# Altium PCB PCB1.PcbDoc
Units mm, origin at the board's own origin, x right, y up, seen from the top; angles counter-clockwise.
Board outline 35.31 x 34.92 mm, 6 copper layers (Top Layer, Layer 1, Layer 2, Layer 3, Layer 4, Bottom Layer), stack 0.746 mm thick; 35 components, 26 nets, 127 pads, 54 vias.
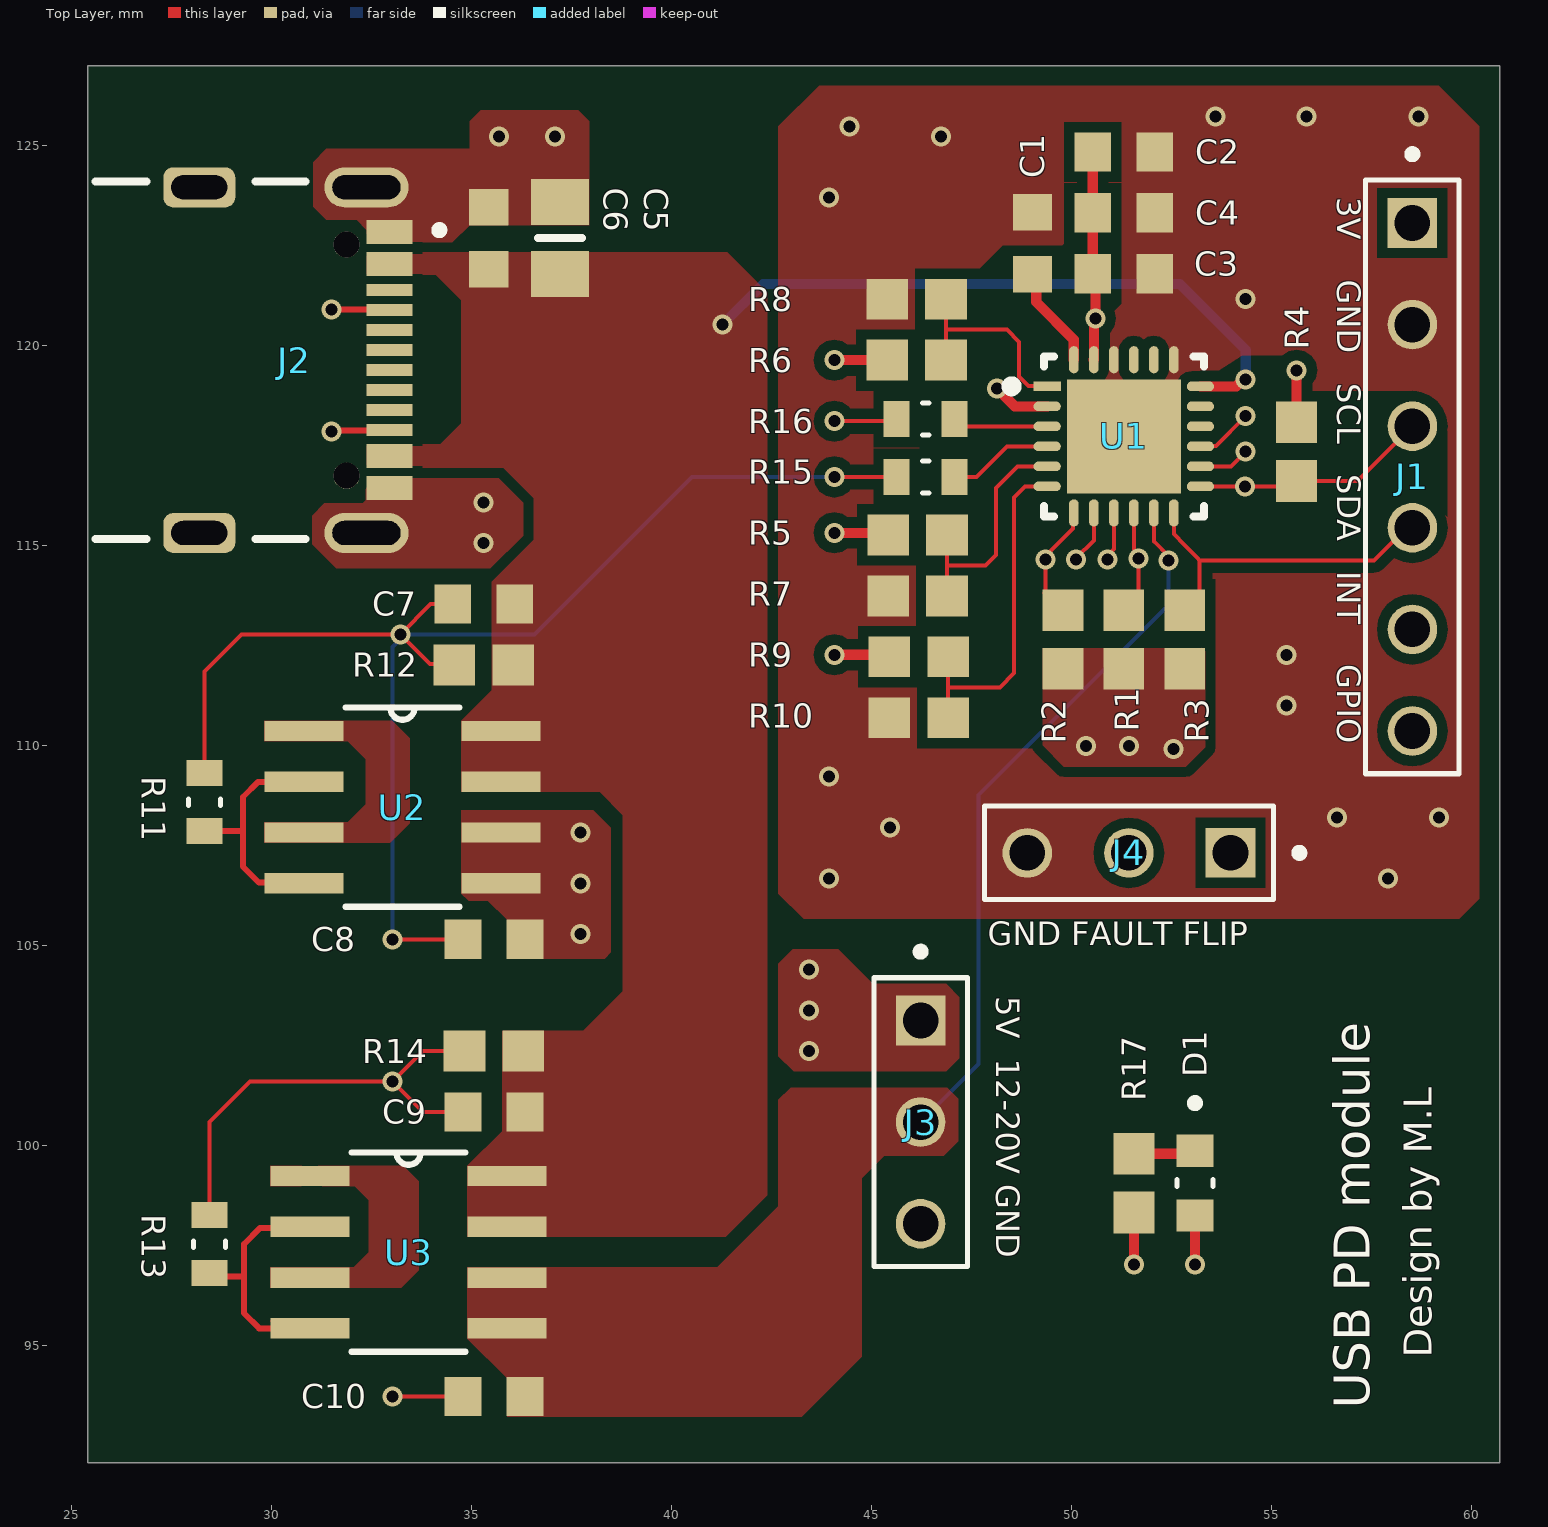
[diagram p0: Top Layer view]
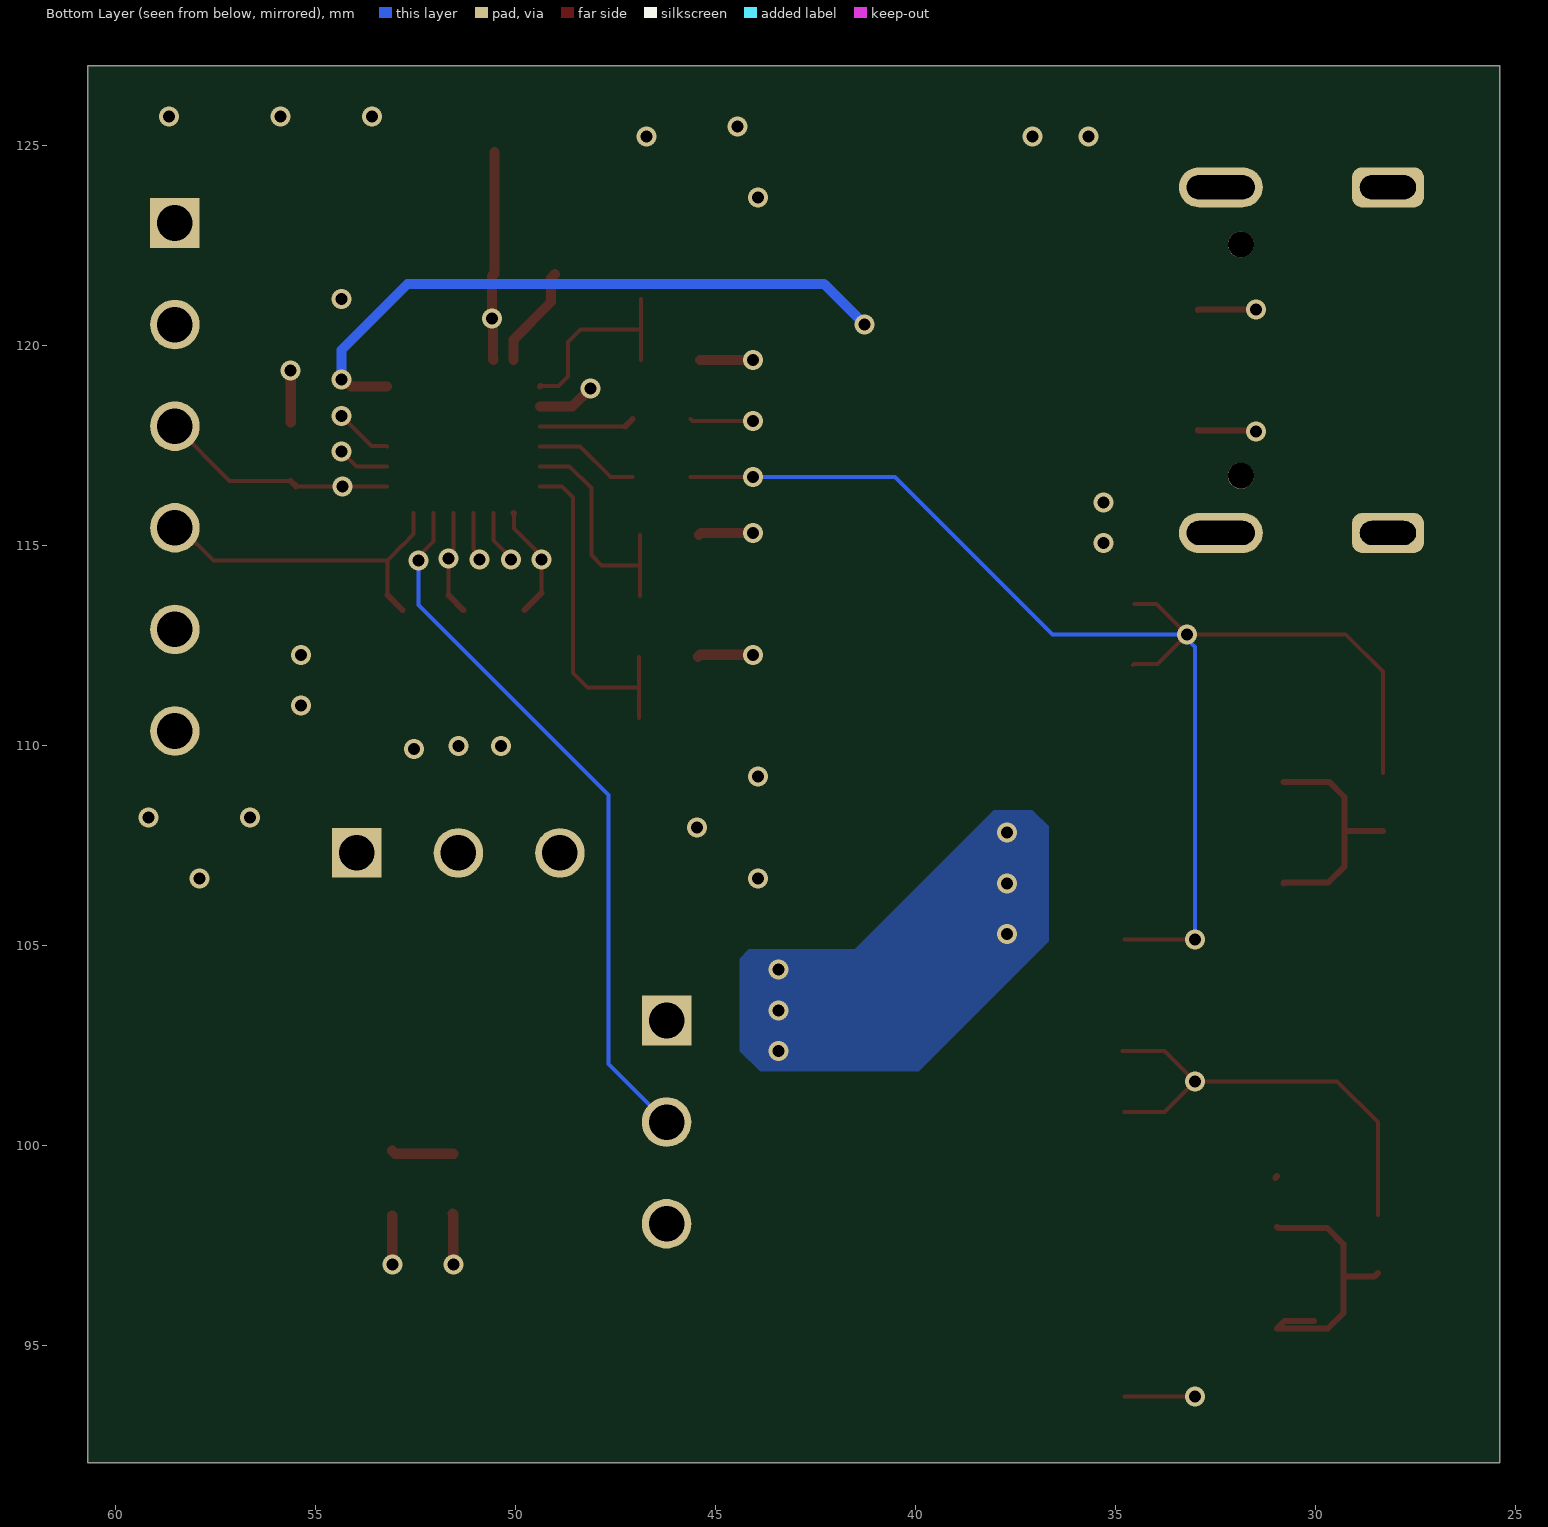
[diagram p1: Bottom Layer view, seen from below]
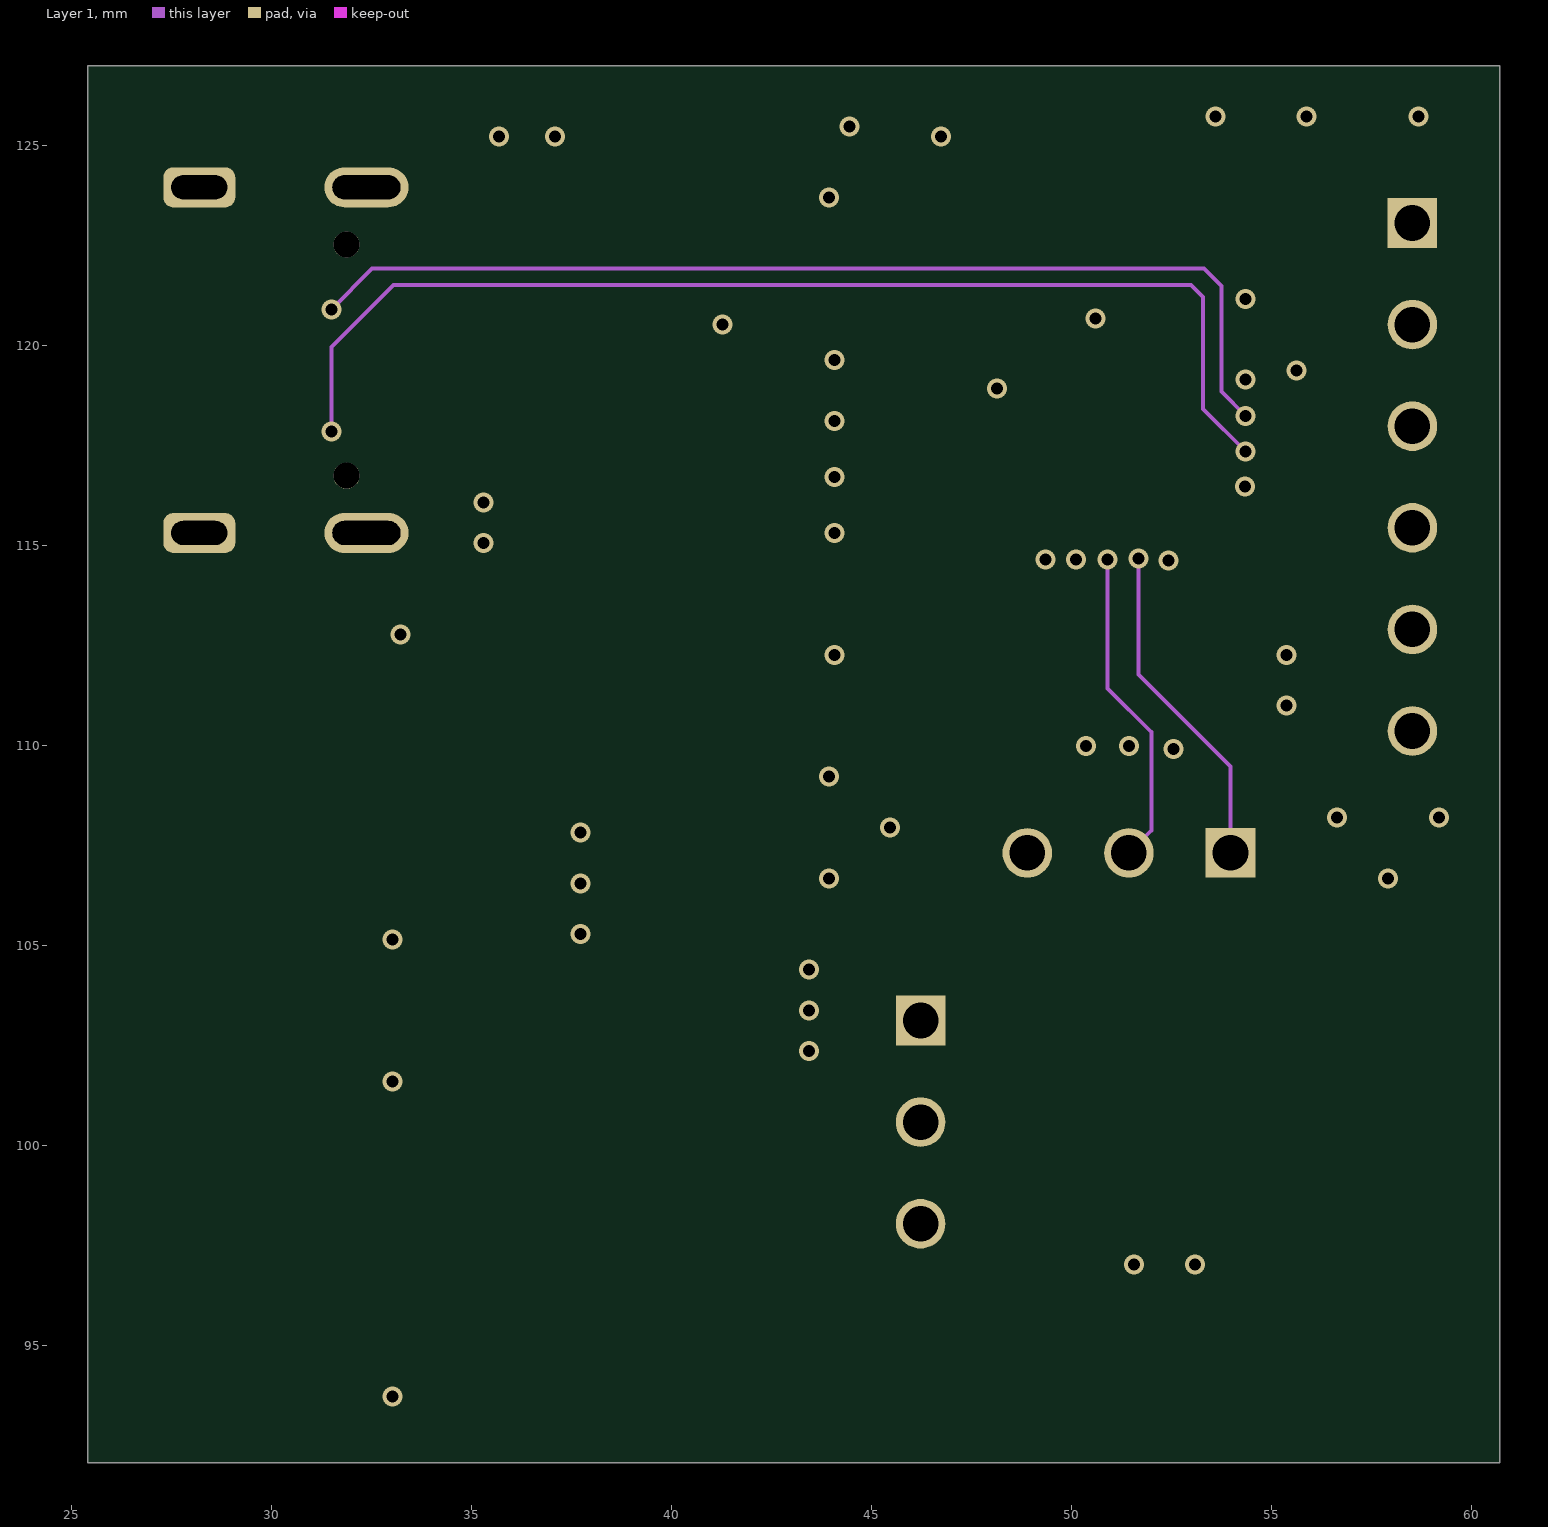
[diagram p2: Layer 1]
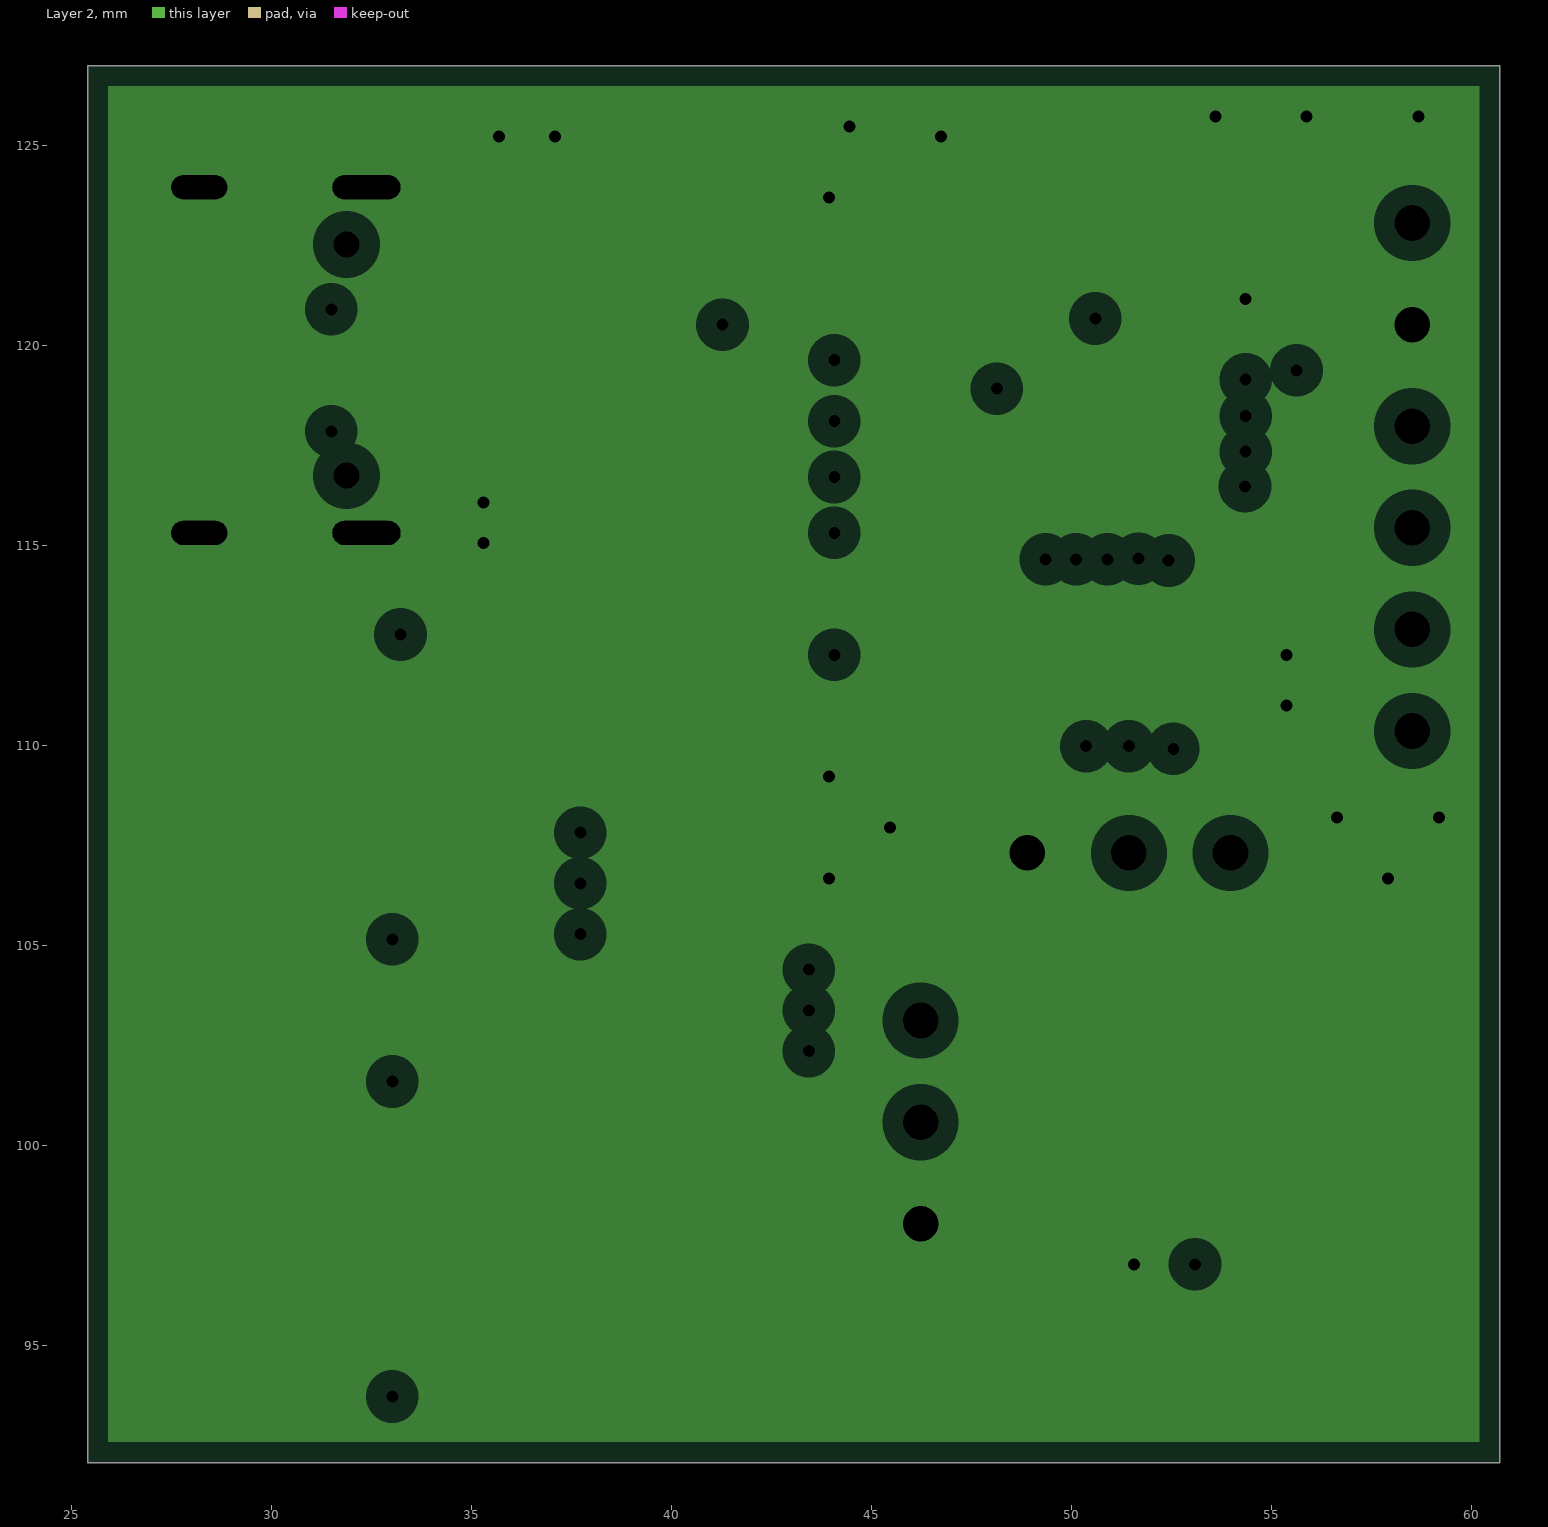
[diagram p3: Layer 2, clearances drawn from the general rule]
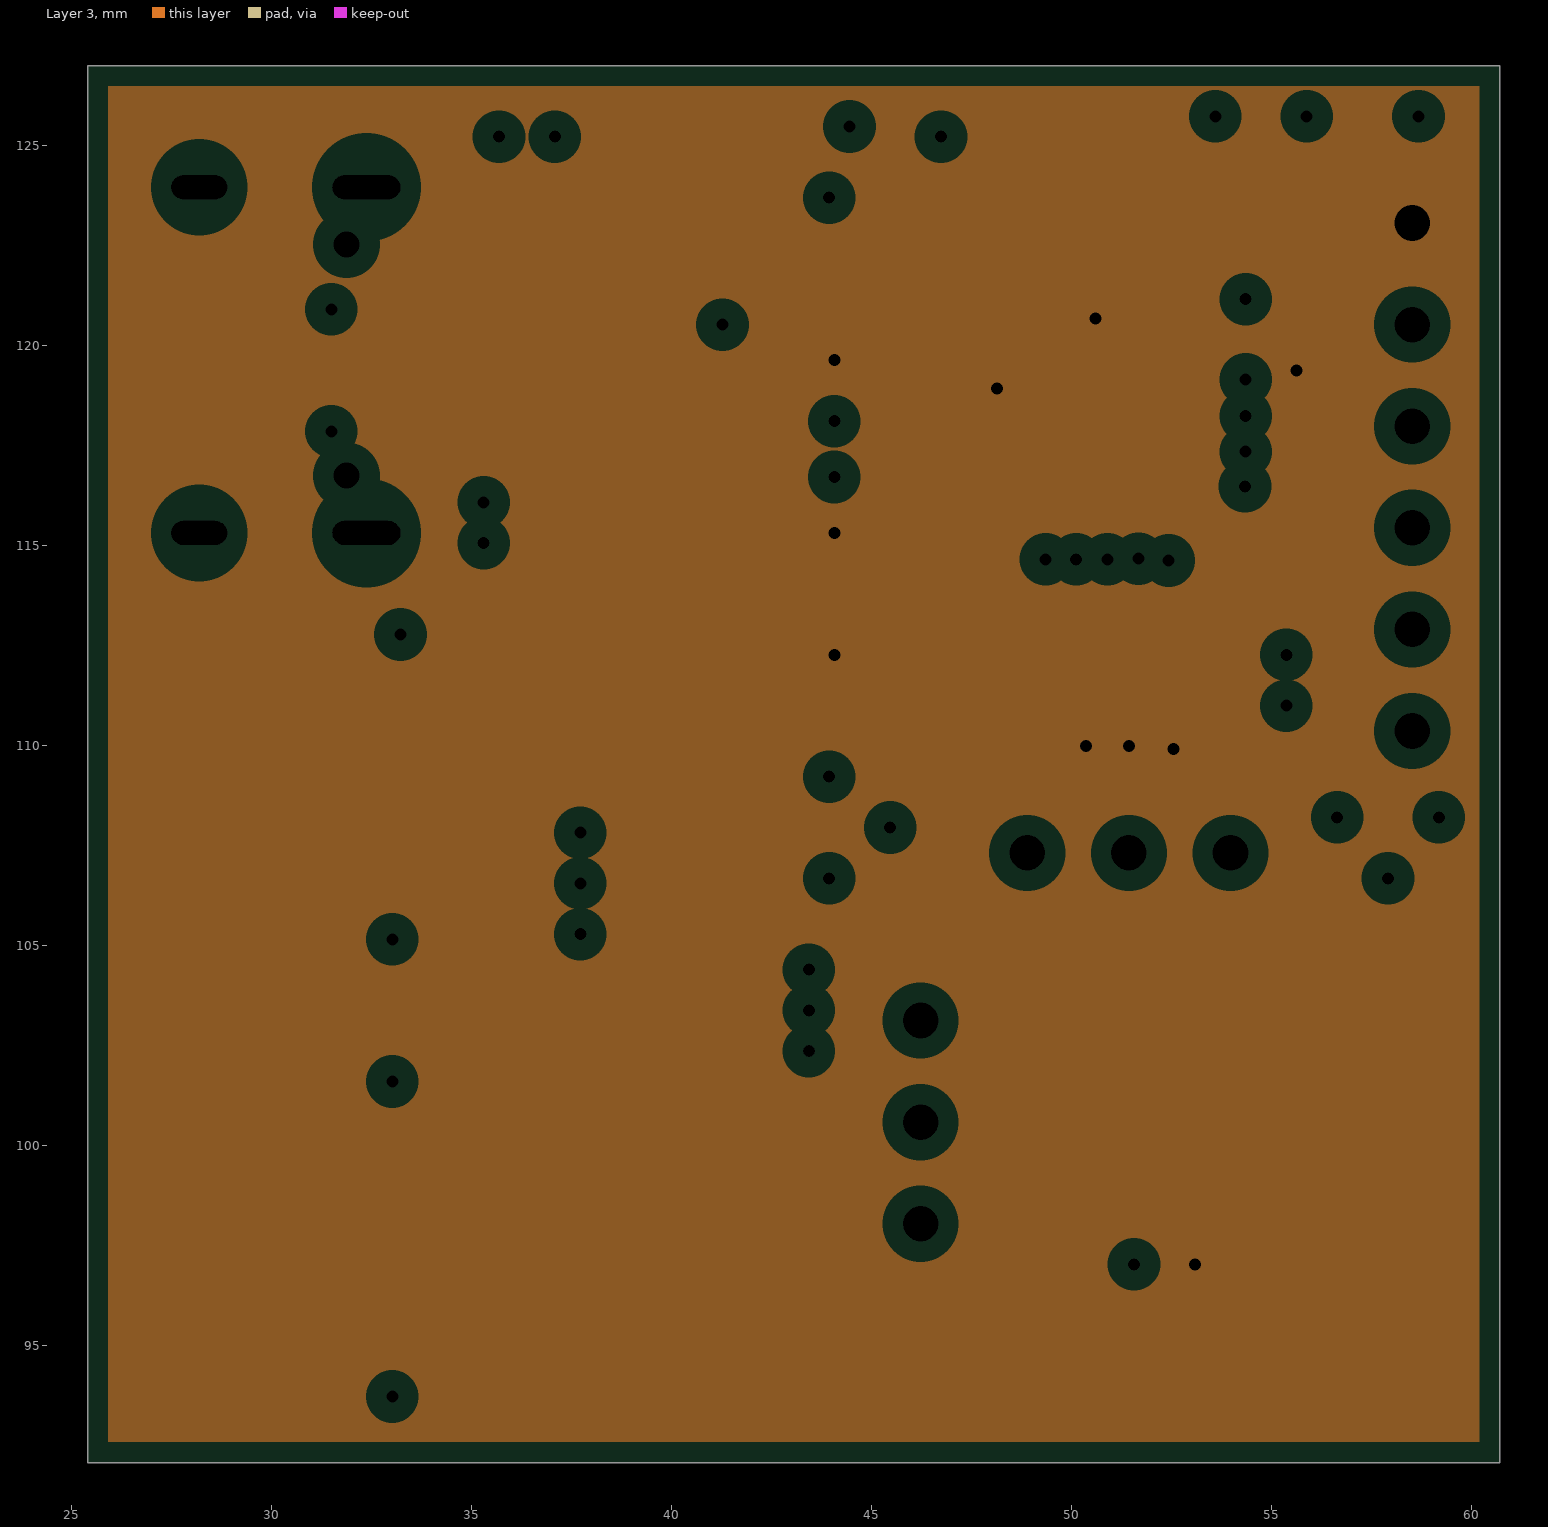
[diagram p4: Layer 3, clearances drawn from the general rule]
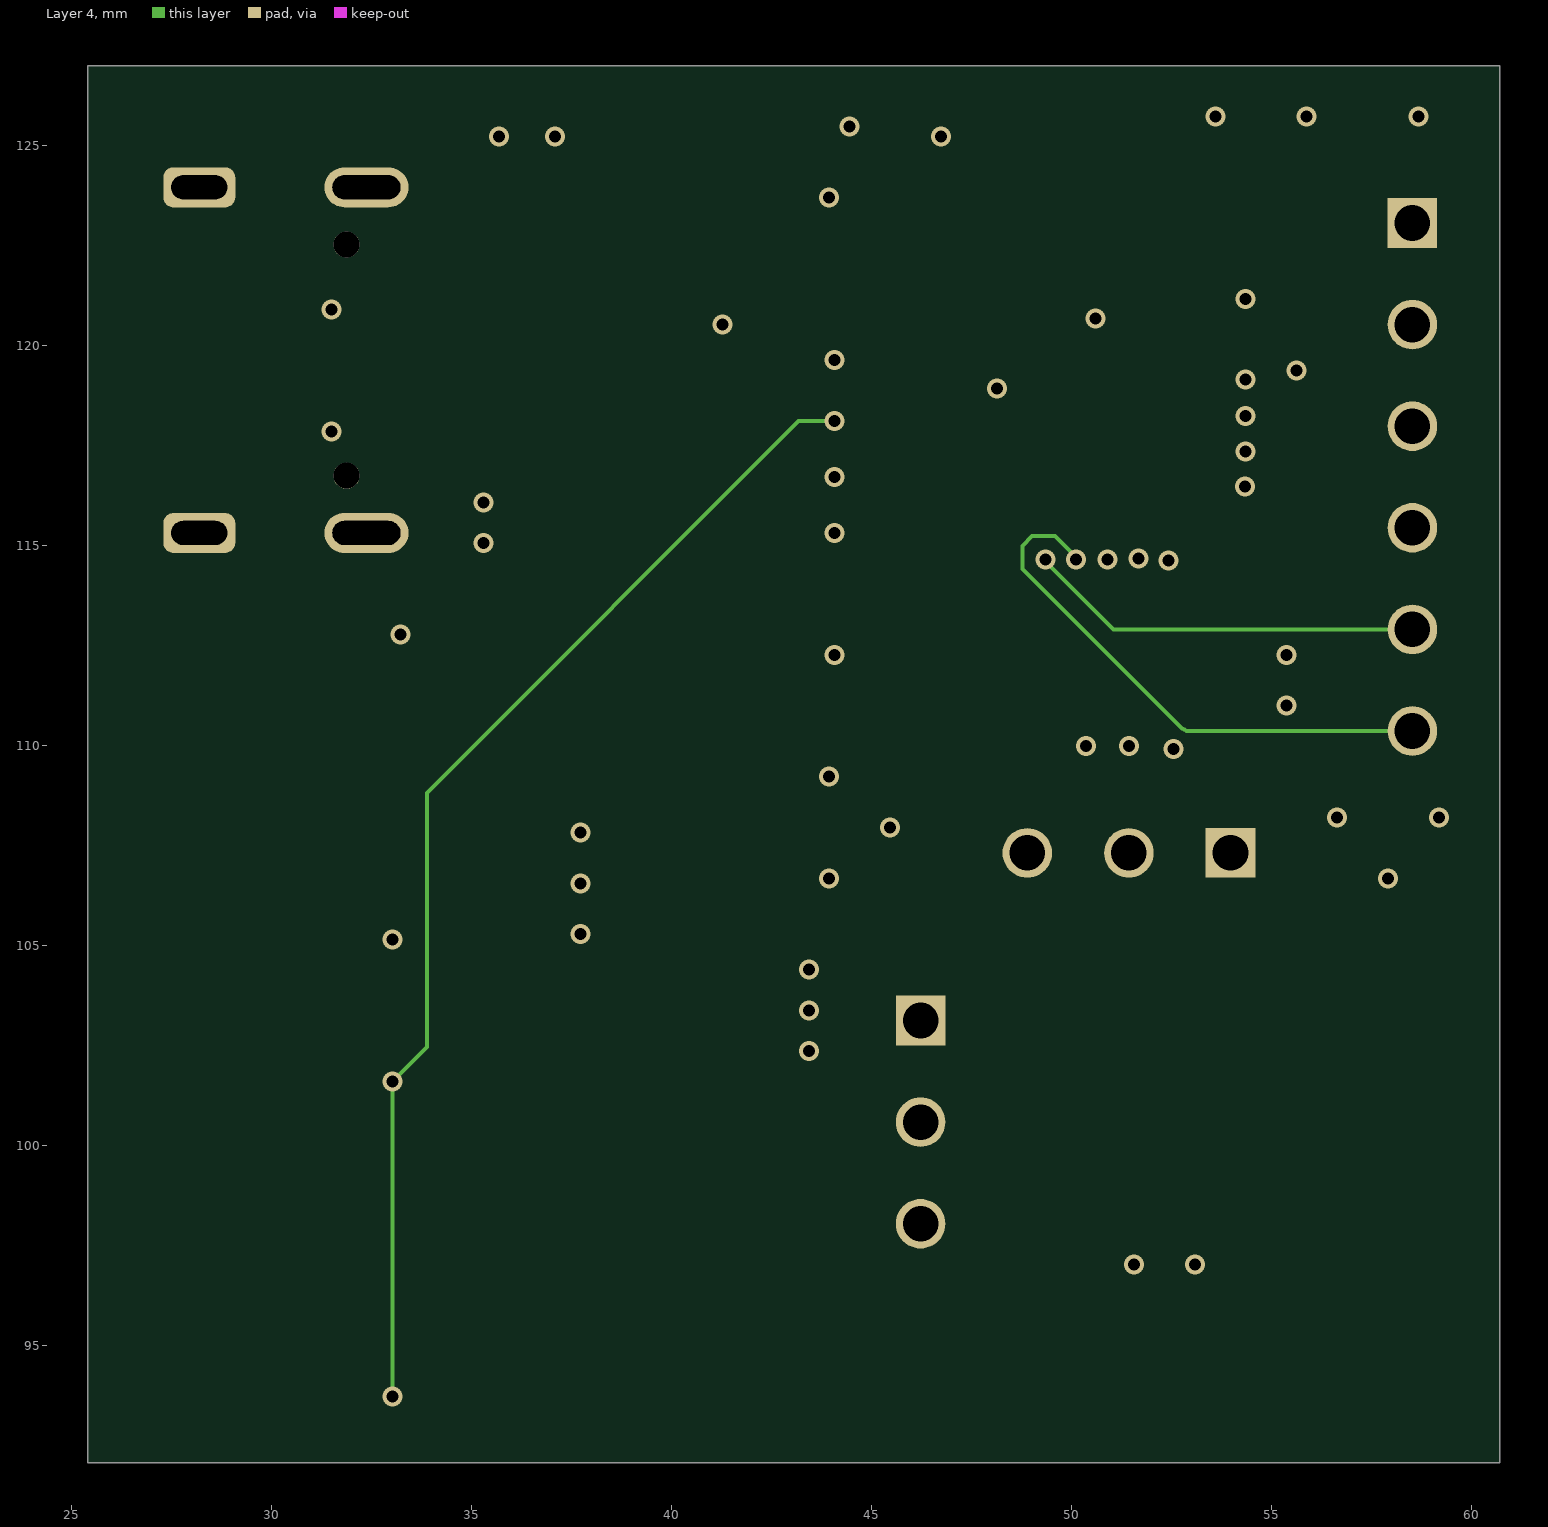
[diagram p5: Layer 4]
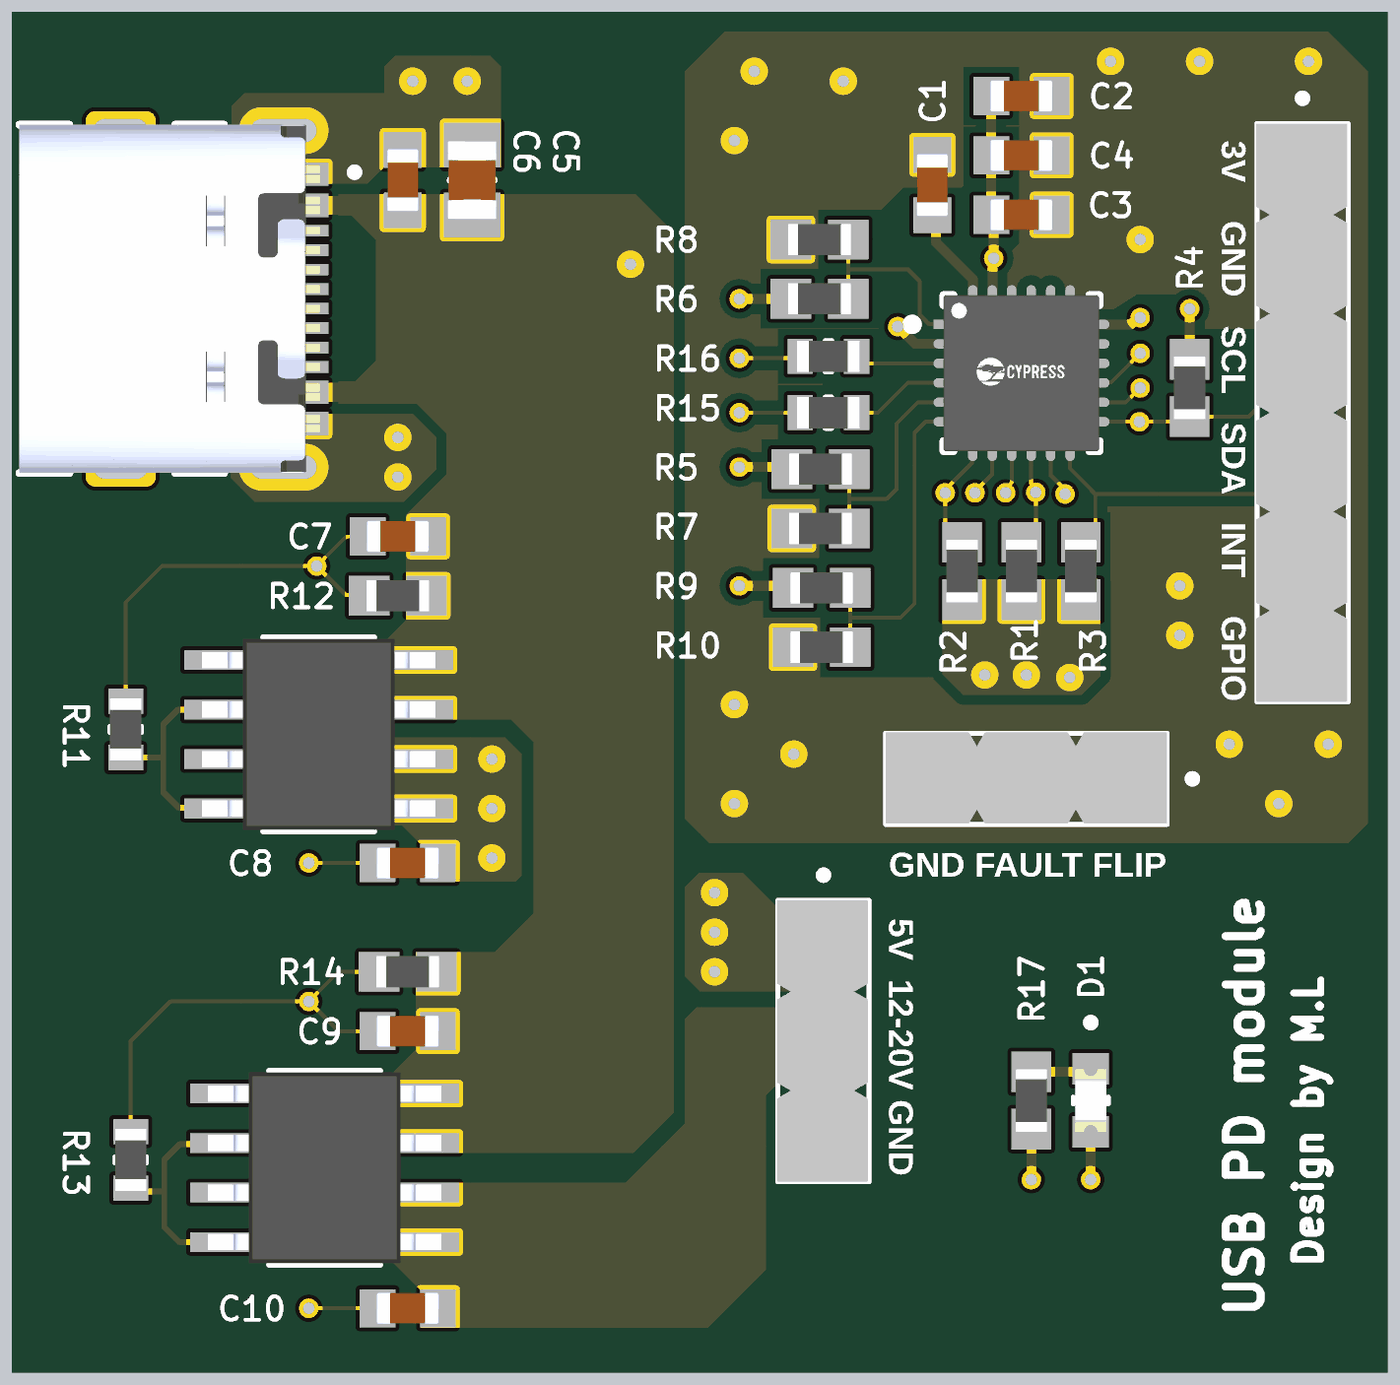
[diagram p6: 3D render of the assembled board from above, using the file's embedded part models]

## Layer stack, top to bottom
Top Solder: solder mask 0.0102, Solder Resist, Dk 3.5
Top Layer: signal copper 0.0356
Dielectric 2: prepreg 0.0711, PP-006, Dk 4.1
Layer 1: signal copper 0.0175
Dielectric 4: prepreg 0.0711, PP-006, Dk 4.1
Layer 2: plane copper 0.0175, net GND
Dielectric 1: dielectric 0.32, FR-4, Dk 4.8
Layer 3: plane copper 0.0175, net +3V3
Dielectric 5: prepreg 0.0711, PP-006, Dk 4.1
Layer 4: signal copper 0.0175
Dielectric 3: prepreg 0.0711, PP-006, Dk 4.1
Bottom Layer: signal copper 0.0356
Bottom Solder: solder mask 0.0102, Solder Resist, Dk 3.5

## Board outline
25.4,127 25.4,92.075 60.706,92.075 60.706,127

## Design rules (kind name [scope] priority, off if disabled: settings)
Clearance Clearance_1 [(ExistsOnLayer('Layer 1') Or ExistsOnLayer('Layer 4')) vs (ExistsOnLayer('Layer 1') Or ExistsOnLayer('Layer 4'))] p1: gap=0.254 ignorepadtopadclearanceinfootprint=TRUE except(0.1: Arc-SMDPad Track-SMDPad; 0.127: Arc-Arc Arc-Track Track-Track SMDPad-SMDPad; 0.33: Arc-THPad Track-THPad) sourcerule=36 cellrowname=All cellrowtype=0 cellcolname=All cellcoltype=0 innerlayers=TRUE
Clearance Clearance_2 [(ExistsOnLayer('Top Layer') Or ExistsOnLayer('Bottom Layer')) vs (ExistsOnLayer('Top Layer') Or ExistsOnLayer('Bottom Layer'))] p2: gap=0.254 ignorepadtopadclearanceinfootprint=TRUE except(0.1: Arc-SMDPad Track-SMDPad; 0.127: Arc-Arc Arc-Track Track-Track SMDPad-SMDPad; 0.33: Arc-THPad Track-THPad) sourcerule=36 cellrowname=All cellrowtype=0 cellcolname=All cellcoltype=0 outerlayers=TRUE
Clearance [All] p3: gap=0.254 ignorepadtopadclearanceinfootprint=TRUE except(0.1: Arc-SMDPad Track-SMDPad; 0.127: Arc-Arc Arc-Track Track-Track SMDPad-SMDPad; 0.33: Arc-THPad Track-THPad) ismatrix=TRUE
HoleToHoleClearance [All] p1: gap=0.5 allowstackedmicrovias=TRUE
PlaneClearance [All] p1: clearance=0.508
PlaneConnect [All] p1: planeconnectstyle=Direct reliefexpansion=0.508 reliefentries=4 reliefconductorwidth=0.254 reliefairgap=0.254
PolygonConnect [All] p1: connectstyle=Direct reliefconductorwidth=0.254 reliefentries=4 polygonreliefangle="90 Angle" airgapwidth=0.254
RoutingVias [All] p1: holewidth=0.3 width=0.5 viastyle="Through Hole" minholewidth=0.3 minwidth=0.5 maxholewidth=0.3 maxwidth=0.5
SolderMaskExpansion [All] p1: expansion=0.102 istentingtop=FALSE
Width [All] p1: maxlimit=5 minlimit=0.09 preferedwidth=0.254 minimp=50.000000 maximp=50.000000 favimp=50.000000
27 further rules are at their usual default settings.

## Components (designator, comment, footprint, x,y, rotation, side; value= is the part's Value field where it differs from the comment)
C1 "CL10A105KB8NNNC" CAPC1608X94N 49.022,122.555 r90 top
C2 "CL10B104KO8NNNC" CAPC1608X94N 51.308,124.841 r0 top
C3 "CL10B104KO8NNNC" CAPC1608X94N 51.308,121.793 r0 top
C4 "CL10A105KB8NNNC" CAPC1608X94N 51.308,123.317 r0 top
C5 "CL21A475KBQNNNE" CAPC2012X140N 37.211,122.682 r270 top
C6 "CL10B104KO8NNNC" CAPC1608X94N 35.433,122.682 r90 top
C7 "CL10A105KB8NNNC" CAPC1608X94N 35.306,113.538 r0 top
C8 "CL10A105KB8NNNC" CAPC1608X94N 35.56,105.156 r0 top
C9 "CL10A105KB8NNNC" CAPC1608X94N 35.56,100.838 r0 top
C10 "CL10A105KB8NNNC" CAPC1608X94N 35.56,93.726 r0 top
D1 "LTST-C190GKT" LEDC1608X35N 53.086,99.06 r270 top
J1 "5-146285-6" TE_5-146285-6 58.522,123.063 r270 top
J2 "USB4105-GF-A" GCT_USB4105-GF-A 28.194,119.634 r270 top
J3 "5-146285-3" TE_5-146285-3 46.228,103.124 r270 top
J4 "5-146285-3" TE_5-146285-3 53.975,107.315 r180 top
R1 "RC0603JR-074K7L" RESC1607X60N 51.308,112.649 r270 top
R2 "ERJ-2RKF2201X" RESC1607X60N 49.784,112.649 r270 top
R3 "ERJ-2RKF2201X" RESC1607X60N 52.832,112.649 r270 top
R4 "ERJ-2RKF2201X" RESC1607X60N 55.626,117.348 r90 top
R5 "ERJ-2RKF2201X" RESC1607X60N 46.153,115.265 r0 top
R6 "ERJ-2RKF2201X" RESC1607X60N 46.128,119.634 r0 top
R7 "ERJ-2RKF2201X" RESC1607X60N 46.153,113.741 r180 top
R8 "ERJ-2RKF2201X" RESC1607X60N 46.128,121.158 r180 top
R9 "ERJ-2RKF2201X" RESC1607X60N 46.18,112.217 r0 top
R10 "ERJ-2RKF2201X" RESC1607X60N 46.18,110.693 r180 top
R11 "ERJ-3GEY0R00V" RES_ERJ-3GEY0R00V 28.321,108.585 r270 top
R12 "RC0603FR-0710KL" RESC1607X60N 35.306,112.014 r0 top
R13 "ERJ-3GEY0R00V" RES_ERJ-3GEY0R00V 28.448,97.536 r270 top
R14 "RC0603FR-0710KL" RESC1607X60N 35.56,102.362 r0 top
R15 "ERJ3EKF1001V" RES_ERJ3EKF1001V 46.355,116.713 r180 top
R16 "ERJ3EKF1001V" RES_ERJ3EKF1001V 46.355,118.161 r180 top
R17 "ERJ-2RKF2201X" RESC1607X60N 51.562,99.06 r90 top
U1 "CYPD3177-24LQXQ" FP-002-16934-IPC_C 51.308,117.729 r0 top
U2 "IRF9358TRPBF" SOIC127P600X175-8N 33.274,108.458 r0 top
U3 "IRF9358TRPBF" SOIC127P600X175-8N 33.426,97.333 r0 top

## Footprints (in the part's own frame and the unit in brackets; to place one, negate y for a bottom-side part, rotate by r counter-clockwise, add the part's x,y. Pads: shape width x height; smd on the part's side, far side on the other; paste and mask are expansions set on the pad)
CAPC1608X94N [mm]
  rect 0.92x0.98 smd: 1(-0.775,0) 2(0.775,0)
  body extent -0.8,-0.41 0.8,0.41, height 0.5
CAPC2012X140N [mm]
  rect 1.15x1.45 smd: 1(-0.9,0) 2(0.9,0)
  silkscreen extent 0,-0.55 0,0.55, body extent -1,-0.63 1,0.63, height 1.35
FP-002-16934-IPC_C [mm]
  rect 0.681x0.239 smd paste+0 mask+0: 1(-1.916,1.25)
  rrect100% 0.681x0.239 smd paste+0 mask+0: 2(-1.916,0.75) 3(-1.916,0.25) 4(-1.916,-0.25) 5(-1.916,-0.75) 6(-1.916,-1.25) 13(1.916,-1.25) 14(1.916,-0.75) 15(1.916,-0.25) 16(1.916,0.25) 17(1.916,0.75) 18(1.916,1.25)
  rrect100% 0.239x0.681 smd paste+0 mask+0: 7(-1.25,-1.916) 8(-0.75,-1.916) 9(-0.25,-1.916) 10(0.25,-1.916) 11(0.75,-1.916) 12(1.25,-1.916) 19(1.25,1.916) 20(0.75,1.916) 21(0.25,1.916) 22(-0.25,1.916) 23(-0.75,1.916) 24(-1.25,1.916)
  rect 2.85x2.85 smd paste-1000 mask+0: 25(0,0)
  silkscreen extent -2.93,-2 2,2, body extent -2.36,-2.36 2.36,2.36, height 0.25
GCT_USB4105-GF-A [mm]
  rect 0.6x1.15 smd: A1_B12(-3.2,4.755) A4_B9(-2.4,4.755) B1_A12(3.2,4.755) B4_A9(2.4,4.755)
  rect 0.3x1.15 smd: A5(-1.25,4.755) A6(-0.25,4.755) A7(0.25,4.755) A8(1.25,4.755) B5(1.75,4.755) B6(0.75,4.755) B7(-0.75,4.755) B8(-1.75,4.755)
  oval 1x2.1 hole 0.6 slot 1.7 at 90 deg: SH1(-4.32,4.18) SH2(4.32,4.18)
  rrect50% 1x1.8 hole 0.6 slot 1.4 at 90 deg: SH3(-4.32,0) SH4(4.32,0)
  round 0.65 hole 0.65 unplated: ""(-2.89,3.68) ""(2.89,3.68)
  silkscreen extent -4.47,-2.6 4.47,6.1, body extent -4.47,-2.6 4.47,5.11, height 3.31
LEDC1608X35N [mm]
  rect 0.81x0.93 smd: A(0.81,0) C(-0.81,0)
  silkscreen extent -2.1,-0.45 0.09,0.45, body extent -0.8,-0.4 0.8,0.4, height 0.8
RES_ERJ3EKF1001V [mm]
  rect 0.65x0.9 smd: 1(-0.725,0) 2(0.725,0)
  silkscreen extent -0.08,-0.4 0.08,0.4, body extent -0.8,-0.4 0.8,0.4, height 0.45
RES_ERJ-3GEY0R00V [mm]
  rect 0.65x0.9 smd: 1(-0.725,0) 2(0.725,0)
  silkscreen extent -0.08,-0.4 0.08,0.4, body extent -0.8,-0.4 0.8,0.4, height 0.45
RESC1607X60N [mm]
  rect 1.04x1.02 smd: 1(-0.735,0) 2(0.735,0)
  body extent -0.8,-0.4 0.8,0.4, height 0.55
SOIC127P600X175-8N [mil]
  rect 78x20 smd: 1(-97,75) 2(-97,25) 3(-97,-25) 4(-97,-75) 5(97,-75) 6(97,-25) 7(97,25) 8(97,75)
  silkscreen extent -56,-98 56,98, body extent -118,-96 118,96, height 69
TE_5-146285-3 [mm]
  rect 1.24x1.24 hole 0.89: 1(0,0)
  round 1.24 hole 0.89: 2(2.54,0) 3(5.08,0)
  silkscreen extent -1.82,-1.17 6.15,1.17, body extent -1.07,-1.19 6.15,1.14, height 8.07
TE_5-146285-6 [mm]
  rect 1.24x1.24 hole 0.89: 1(0,0)
  round 1.24 hole 0.89: 2(2.54,0) 3(5.08,0) 4(7.62,0) 5(10.16,0) 6(12.7,0)
  silkscreen extent -1.82,-1.17 13.77,1.17, body extent -1.07,-1.19 13.77,1.14, height 7.11

## Part data
C1 C4 C7 C8 C9 C10: library part 06035C105KAT2A, "CAP CER 1UF 50V X5R 0603", Package=None, Availability=Unavailable, MF="{'manufacturer': u'KYOCERA AVX Components Corporation'}", MP=06035C105KAT2A, Price=None
C2 C3 C6: library part 06035C105KAT2A, "CAP CER 0.1UF 16V X7R 0603", Package=None, Availability=Unavailable, MF="{'manufacturer': u'KYOCERA AVX Components Corporation'}", MP=06035C105KAT2A, Price=None
C5: "Cap Ceramic 4.7uF 50V X5R 10% SMD 0805 85Â°C Embossed Plastic T/R", Package=None, Availability=Unavailable, MF="{'manufacturer': u'Samsung Electro-Mechanics'}", MP=CL21A475KBQNNNE, Price=None
D1: "LED; SMD; 0603; Green; 18-180mcd; 1.6x0.8x0.8mm; 130Â°; 1.6Ã·2.4V; 20mA <a href=\"https://pricing.snapeda.com/parts/LTST-C190GKT/Lite-On%20Inc./view-part?ref=eda\">Check availability</a>", Package=None, Availability=Unavailable, MF="{'manufacturer': u'Lite-On Inc.'}", MP=LTST-C190GKT, Price=None
J1 J2 J3 J4 R15 R16: Package=None, Availability=Unavailable, Price=None
  J1: MF="{'manufacturer': u'TE Connectivity'}", MP=5-146285-6
  J2: MF="{'manufacturer': u'GCT'}", MP=USB4105-GF-A
  J3 J4: MF="{'manufacturer': u'TE Connectivity'}", MP=5-146285-3
  R15 R16: MF="{'manufacturer': u'Panasonic'}", MP=ERJ3EKF1001V
R1: library part RC0603FR-0710KL, "RES 4.7K OHM 5% 1/10W 0603", Package=None, Availability=Unavailable, MF="{'manufacturer': u'Yageo'}", MP=RC0603FR-0710KL, Price=None
R2 R3 R4 R5 R6 R7 R8 R9 R10 R17: library part RC0603FR-0710KL, "RES SMD 2.2K OHM 1% 1/10W 0402", Package=None, Availability=Unavailable, MF="{'manufacturer': u'Yageo'}", MP=RC0603FR-0710KL, Price=None
R11 R13: "<a href=\"https://pricing.snapeda.com/parts/ERJ-3GEY0R00V/Panasonic/view-part?ref=eda\">Check availability</a>", Package=None, Availability=Unavailable, MF="{'manufacturer': u'Panasonic'}", MP=ERJ-3GEY0R00V, Price=None
R12 R14: "YAGEO RC0603FR-0710KL / RESISTOR 10K 1/10W 1% 0603 YAG <a href=\"https://pricing.snapeda.com/parts/RC0603FR-0710KL/Yageo/view-part?ref=eda\">Check availability</a>", Package=None, Availability=Unavailable, MF="{'manufacturer': u'Yageo'}", MP=RC0603FR-0710KL, Price=None
U1: library part CMP-12917-000005-1, "IC USB TYPE-C PORT CONTROL 24QFN"
U2 U3: "HEXFET Power MOSFET", Package=None, Availability=Unavailable, MF="{'manufacturer': u'Infineon'}", MP=IRF9358TRPBF, Price=None

## Via types
v1: diameter 0.5, hole 0.3, Top Layer to Bottom Layer, 54 vias

## Nets (pads, with @x,y where several pads share a name; then routed paths per layer and width w, separated by ;. In a path a pad name is that pad's centre, name@x,y a point inside that pad or via, vN(x,y) a via of type N, cw(c..) or ccw(c..) an arc to the next point about the centre after c; other vN are vias at no path point)
+3V3: C2.1 C3.1 C4.1 D1.A J1.1 R1.2 R2.2 R3.2 R4.2 R5.1 R6.1 R9.1 U1.2 U1.23 | length 13.3
  Top Layer w0.254: v1(44.069,112.268) 45.395,112.268 R9.1 ; v1(44.069,115.316) 45.368,115.316 R5.1 ; v1(44.069,119.634) R6.1 ; v1(48.133,118.923) 48.138,118.923 48.582,118.479 U1.2 ; C2.1 C4.1 C3.1 50.597,121.729 v1(50.597,120.675) 50.565,120.644 50.565,119.652 U1.23 ; v1(53.086,97.028) D1.A ; R4.2 v1(55.626,119.38)
  other v1: 52.548,109.916 50.368,109.982 51.435,109.982
CC1: J2.A5 U1.15 | length 29.3
  Top Layer w0.1: U1.15 53.237,117.493 53.612,117.493 v1(54.356,118.237)
  Top Layer w0.15: v1(31.496,120.904) 31.506,120.894 32.939,120.894 J2.A5
  Layer 1 w0.1: v1(31.496,120.904) 32.512,121.92 53.315,121.92 53.746,121.488 53.746,118.847 v1(54.356,118.237)
CC2: J2.B5 U1.14 | length 31.7
  Top Layer w0.1: U1.14 53.987,116.979 v1(54.356,117.348)
  Top Layer w0.15: v1(31.496,117.856) 31.51,117.87 32.935,117.87 J2.B5
  Layer 1 w0.1: v1(31.496,117.856) 31.496,119.964 33.045,121.514 52.984,121.514 53.289,121.209 53.289,118.415 v1(54.356,117.348)
DC_OUT: C10.2 J3.2 U1.11 U3.5 U3.6 | length 18
  Top Layer w0.1: U1.11 52.058,115.106 52.433,114.731 52.433,114.638 v1@52.424,114.629
  Top Layer w0.15: v1@52.424,114.629 v1(52.429,114.625)
  Bottom Layer w0.1: J3.2 47.676,102.032 47.676,108.763 52.429,113.516 v1(52.429,114.625)
FAULT: J4.2 U1.9 | length 9.2
  Top Layer w0.1: v1(50.902,114.656) 50.902,114.758 51.058,114.914 U1.9
  Layer 1 w0.1: v1(50.902,114.656) 50.902,111.43 51.994,110.338 51.994,107.874 J4.2
FLIP: J4.1 R1.1 U1.10 | length 10.9
  Top Layer w0.1: U1.10 51.558,114.896 51.676,114.778 v1(51.676,114.669) ; R1.1@51.676,113.752 v1@51.676,114.554
  Top Layer w0.15: R1.1 R1.1@51.676,113.752 ; v1@51.618,114.611 v1@51.676,114.554
  Layer 1 w0.1: v1(51.676,114.669) 51.676,111.773 53.975,109.474 J4.1
GND: C1.2 C2.2 C3.2 C4.2 C5.1 C6.2 J1.2 J2.A1_B12 J2.B1_A12 J2.SH1 J2.SH2 J2.SH3 J2.SH4 J3.3 J4.3 R7.2 R8.2 R10.2 R17.1 U1.19 U1.22 U1.25 | length 1.3
  Top Layer w0.1: R17.1 R17.1@51.584,98.303
  Top Layer w0.254: v1(51.562,97.028) 51.562,98.282 R17.1@51.584,98.303
  other v1: 43.942,106.68 57.912,106.68 45.466,107.95 56.642,108.204 59.182,108.204 43.942,109.22 55.372,110.998 55.372,112.268 35.306,115.062 35.306,116.078 54.356,121.158 43.942,123.698 35.687,125.222 37.084,125.222 46.736,125.222 44.45,125.476 53.594,125.73 55.88,125.73 58.674,125.73
GPIO: J1.6 U1.8 | length 15
  Top Layer w0.1: v1@50.114,114.687 50.558,115.131 U1.8
  Top Layer w0.15: v1(50.114,114.656) v1@50.114,114.687
  Layer 4 w0.1: v1@50.114,114.712 49.592,115.235 49.017,115.235 48.773,114.991 48.773,114.416 52.763,110.426 cw(c52.548,109.916) 52.874,110.363 J1.6
  Layer 4 w0.15: v1(50.114,114.656) v1@50.114,114.712
INT: J1.5 R2.1 U1.7 | length 12.8
  Top Layer w0.1: R2.1@49.352,113.816 v1(49.352,114.656) 49.352,114.732 50.042,115.421 U1.7@50.042,115.797
  Top Layer w0.15: R2.1@49.352,113.816 R2.1 ; U1.7@50.042,115.797 U1.7
  Layer 4 w0.1: v1@49.352,114.599 51.048,112.903 J1.5
  Layer 4 w0.15: v1@49.352,114.599 v1(49.352,114.656)
NetC1_1: C1.1 U1.24 | length 2.6
  Top Layer w0.254: C1.1 49.118,121.684 49.118,121.088 50.058,120.147 U1.24
NetC7_1: C7.1 C8.1 R11.1 R12.1 R15.2 | length 34.6
  Top Layer w0.1: R11.1 28.321,111.847 29.25,112.776 v1(33.223,112.776) ; v1(33.02,105.156) C8.1 ; C7.1 34.525,113.532 33.98,113.532 v1(33.223,112.776) ; R12.1 34.545,112.04 33.96,112.04 v1(33.223,112.776) ; v1(44.069,116.713) R15.2
  Bottom Layer w0.1: v1(33.02,105.156) 33.02,112.465 33.223,112.668 v1(33.223,112.776) 36.576,112.776 40.513,116.713 v1(44.069,116.713)
NetC9_1: C9.1 C10.1 R13.1 R14.1 R16.2 | length 44.3
  Top Layer w0.1: R13.1 28.448,100.584 29.464,101.6 v1(33.02,101.6) ; v1(33.02,93.726) C10.1 ; C9.1 33.782,100.838 v1(33.02,101.6) ; R14.1 33.782,102.362 v1(33.02,101.6) ; v1(44.069,118.11) 45.579,118.11 R16.2
  Layer 4 w0.1: v1(33.02,93.726) v1(33.02,101.6) 33.884,102.464 33.884,108.814 43.18,118.11 v1(44.069,118.11)
NetD1_C: D1.C R17.2 | length 1.6
  Top Layer w0.254: R17.2 53.011,99.795 D1.C
NetR5_2: R5.2 R7.1 U1.5 | length 6
  Top Layer w0.1: R7.1 46.888,114.503 ; R5.2 46.888,114.503 ; U1.5 48.653,116.979 48.108,116.434 48.108,114.757 47.854,114.503 46.888,114.503
NetR6_2: R6.2 R8.1 U1.1 | length 5.1
  Top Layer w0.1: R6.2 46.863,120.396 ; R8.1 46.863,120.396 ; U1.1@49.379,118.992 48.927,118.992 48.692,119.228 48.692,120.091 48.387,120.396 46.863,120.396
  Top Layer w0.15: U1.1@49.379,118.992 U1.1
NetR9_2: R9.2 R10.1 U1.6 | length 8.7
  Top Layer w0.1: R10.1 46.915,111.455 ; R9.2 46.915,111.455 ; U1.6 48.839,116.479 48.565,116.205 48.565,111.811 48.209,111.455 46.915,111.455
NetR11_2: R11.2 U2.2 U2.4 | length 6.1
  Top Layer w0.15: R11.2 29.268,107.86 29.286,107.841 ; U2.4 30.789,106.574 29.682,106.574 29.286,106.971 29.286,107.841 ; U2.2 29.667,109.093 29.286,108.712 29.286,107.841
NetR13_2: R13.2 U3.2 U3.4 | length 7.3
  Top Layer w0.15: R13.2 28.536,96.723 29.312,96.723 ; U3.4@30.047,95.607 30.784,95.607 U3.4 29.693,95.428 29.312,95.809 29.312,96.723 ; U3.2 30.937,97.942 29.718,97.942 29.312,97.536 29.312,96.723
NetU2_1: U2.1 U2.3
NetU3_1: U3.1 U3.3 | length 0.1
  Top Layer w0.15: U3.1 U3.1@31.009,99.191
Safe: C8.2 J3.1 U2.5 U2.6
  other v1: 43.434,102.362 43.434,103.378 43.434,104.394 37.719,105.283 37.719,106.553 37.719,107.823
SCL: J1.3 R4.1 U1.13 | length 5.9
  Top Layer w0.1: U1.13 v1(54.336,116.479) R4.1@55.492,116.479 ; R4.1 57.152,116.613 J1.3
  Top Layer w0.15: R4.1@55.492,116.479 R4.1
SDA: J1.4 R3.1 U1.12 | length 8.5
  Top Layer w0.1: U1.12 52.558,115.284 52.823,115.014 cw(c52.429,114.625) 52.825,115.012 53.146,114.684 53.204,114.625 ; R3.1@53.204,113.756 53.204,114.625 ; J1.4 58.377,115.443 57.56,114.625 53.204,114.625
  Top Layer w0.15: R3.1 R3.1@53.204,113.756
VBUS_FET_EN: R16.1 U1.3 | length 2.4
  Top Layer w0.1: R16.1@47.262,117.979 U1.3
  Top Layer w0.15: R16.1 R16.1@47.262,117.979
VCC: C5.2 C6.1 C7.2 C9.2 J2.A4_B9 J2.B4_A9 R12.2 R14.2 U1.18 U2.7 U2.8 U3.7 U3.8 | length 16.1
  Top Layer w0.254: U1.18 54.117,118.979 54.289,119.151 v1(54.356,119.151)
  Bottom Layer w0.254: v1(41.275,120.523) 42.291,121.539 52.705,121.539 54.356,119.888 v1(54.356,119.151)
VSAFE_FET_EN: R15.1 U1.4 | length 2.6
  Top Layer w0.1: R15.1 47.625,116.713 48.391,117.479 U1.4
pads on no net: J2. J2.A6 J2.A7 J2.A8 J2.B6 J2.B7 J2.B8 U1.16 U1.17 U1.20 U1.21

## Polygon pours and split planes (outlines as drawn)
GND on Top Layer "GND_L01_P009" (solid, pour order 9): 42.672,106.299 43.307,105.664 59.69,105.664 60.198,106.172 60.198,125.476 59.182,126.492 43.688,126.492 42.672,125.476
GND on Top Layer "GND_L01_P012" (solid, pour order 12): 32.36,116.738 32.36,116.129 32.283,116.053 31.318,116.053 31.013,115.748 31.013,115.037 31.623,114.427 35.585,114.427 36.373,115.214 36.373,116.027 35.662,116.738
GND on Top Layer "GND_L01_P011" (solid, pour order 11): 34.468,122.53 34.95,123.012 34.95,124.917 31.369,124.917 31.039,124.587 31.039,123.469 31.369,123.139 32.131,123.139 32.385,122.885 32.385,122.53
GND on Top Layer "GND_L01_P010" (solid, pour order 10): 37.948,123.012 34.95,123.012 34.95,125.603 35.23,125.882 37.668,125.882 37.948,125.603
NetU3_1 on Top Layer "NETU3_1_L01_P000" (solid, pour order 0): 29.972,96.444 33.249,96.444 33.68,96.876 33.68,99.111 33.274,99.517 33.249,99.492 29.972,99.492 29.972,98.984 32.08,98.984 32.436,98.628 32.436,97.333 32.055,96.952 29.972,96.952
+3V3 on Top Layer "+3V3_L01_P008" (solid, pour order 8): 49.277,112.428 49.276,112.427 49.276,110.007 49.809,109.474 52.857,109.474 53.34,109.957 53.34,112.446
Safe on Top Layer "SAFE_L01_P006" (solid, pour order 6): 34.747,108.382 37.16,108.382 38.049,108.382 38.481,107.95 38.481,104.826 38.329,104.673 35.89,104.673 35.89,105.639 35.408,106.121 34.925,106.121 34.747,106.299
Safe on Top Layer "SAFE_L01_P005" (solid, pour order 5): 46.863,101.854 47.193,102.184 47.193,103.708 46.863,104.038 45.034,104.038 44.171,104.902 43.028,104.902 42.672,104.546 42.672,102.235 43.053,101.854
DC_OUT on Top Layer "DC_OUT_L01_P004" (solid, pour order 4): 34.9,96.952 34.9,95.174 35.89,94.183 35.89,93.218 43.256,93.218 44.755,94.717 44.755,99.187 45.314,99.746 46.812,99.746 47.168,100.101 47.168,101.168 46.888,101.448 42.977,101.448 42.672,101.143 42.672,98.476 41.148,96.952
VCC on Top Layer "VCC_L01_P002" (solid, pour order 2): 35.509,114.097 36.551,115.138 36.551,116.18 35.789,116.942 32.385,116.942 32.385,117.526 34.214,117.526 34.747,118.059 34.747,121.133 34.112,121.768 32.385,121.768 32.385,122.326 41.394,122.326 42.393,121.328 42.393,98.755 41.351,97.714 34.9,97.714 34.9,99.492 35.763,100.355 35.763,102.87 37.795,102.87 38.786,103.861 38.786,108.255 38.202,108.839 34.747,108.839 34.747,110.617 35.509,111.379
NetU2_1 on Top Layer "NETU2_1_L01_P001" (solid, pour order 1): 29.82,110.617 29.82,110.109 31.902,110.109 32.36,109.652 32.36,108.534 31.902,108.077 29.82,108.077 29.82,107.569 32.969,107.569 33.452,108.052 33.452,110.185 33.02,110.617
Safe on Bottom Layer "SAFE_L06_P007" (solid, pour order 7): 44.171,104.902 41.529,104.902 38.049,108.382 37.084,108.382 36.678,107.975 36.678,105.105 39.929,101.854 43.891,101.854 44.399,102.362 44.399,104.673
+3V3 on Layer 3 (split plane): 60.196,92.585 25.91,92.585 25.91,126.49 60.196,126.49
GND on Layer 2 (split plane): 60.196,92.585 25.91,92.585 25.91,126.49 60.196,126.49

## Other copper
Top Layer:
  pour cut-out: 49.819,122.573 49.819,122.537 51.247,122.537 51.247,122.573
  pour cut-out: 50.083,120.675 50.083,120.876 50.208,121.001 50.208,121.049 49.819,121.049 49.819,122.537 49.809,122.537 49.689,122.417 49.689,121.066
  pour cut-out: 48.364,111.169 48.364,111.205 48.875,111.716 48.875,114.303 49.02,114.158 49.015,114.153 49.015,111.169
  pour cut-out: 53.204,114.625 51.663,116.167 48.965,116.167 48.875,116.077 48.875,114.303 49.183,113.995 53.264,113.995
  pour cut-out: 54.862,116.331 54.862,118.857 55.238,118.857 55.238,119.097 55.151,119.183 55.263,119.295 55.263,119.743 54.27,119.743 53.535,119.279
  pour cut-out: 53.803,118.591 53.986,118.591 53.986,118.305 53.801,118.12 53.721,118.2
  pour cut-out: 46.209,118.865 46.501,118.865 46.501,116.029 46.209,116.029
  pour cut-out: 51.247,121.049 50.954,120.756 50.954,120.888 51.115,121.049
  pour cut-out: 49.037,109.908 49.016,109.929 47.689,109.929 47.689,111.145 47.713,111.169 49.015,111.169 49.022,111.176
  pour cut-out: 56.39,116.923 56.39,118.857 58.637,118.857 57.707,117.927 57.707,117.607 57.023,116.923
  pour cut-out: 56.39,118.857
  pour cut-out: 59.396,117.868 59.396,115.721 58.859,116.257 58.1,116.257 57.648,115.805 57.648,115.226 57.685,115.189 57.432,114.935 53.334,114.935 52.879,115.39 52.879,115.955 53.092,116.169 54.853,116.169 54.862,116.16 54.862,115.839 56.39,115.839 56.39,116.303 57.28,116.303 58.16,117.183
  pour cut-out: 47.637,121.922 47.706,121.922 48.278,122.494 48.278,121.066 48.733,121.066 49.67,120.13 49.67,119.431 49.677,119.424 49.619,119.365 49.619,119.353 49.005,119.353 49.002,119.356 49.002,120.091 48.387,120.706 47.637,120.706

## Silkscreen, mask and mechanical layers (free items; w line width, h text height)
Top Overlay:
  text "3V    GND   SCL   SDA   INT    GPIO" at 56.448,123.7 h1 r270
  text "GND FAULT FLIP" at 47.902,104.809 h1
  text "5V  12-20V GND" at 47.913,103.736 h1 r270
  text "Design by M.L" at 59.003,94.688 h0.7 r90
  text "USB PD module" at 57.458,93.418 h0.9 r90